# EAGLE board christmas_card (EAGLE 9.6.2)
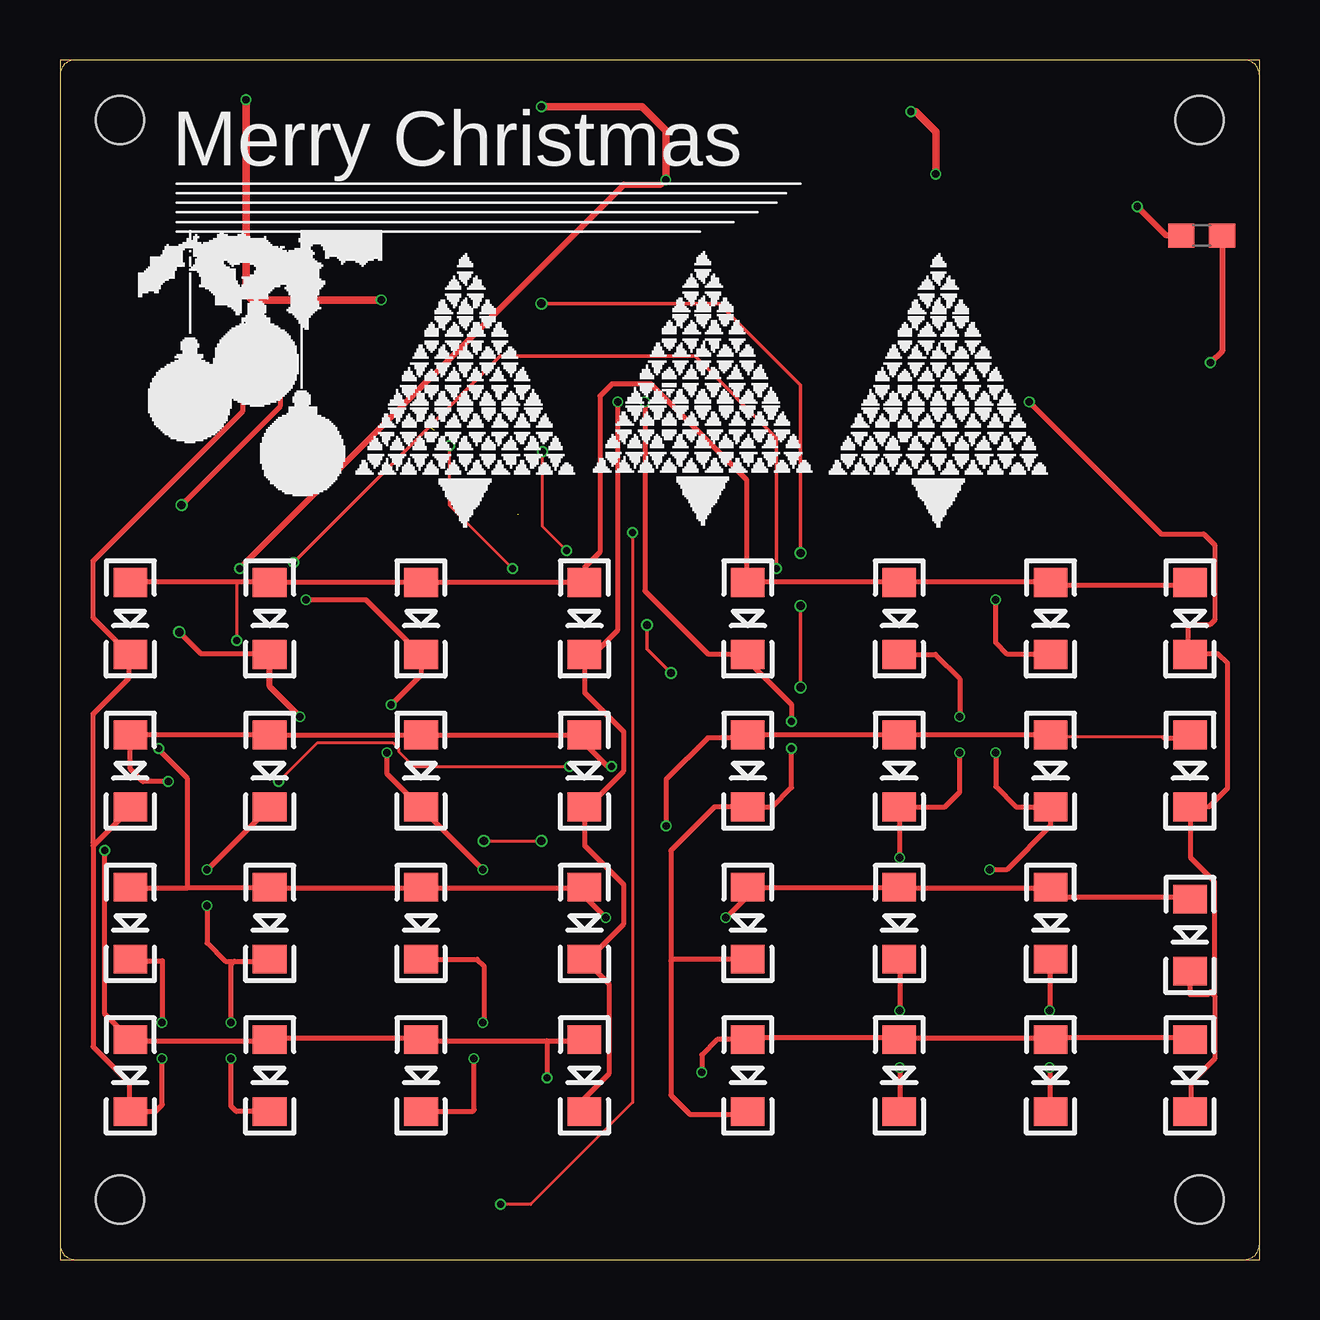
[diagram p0: board, top side]
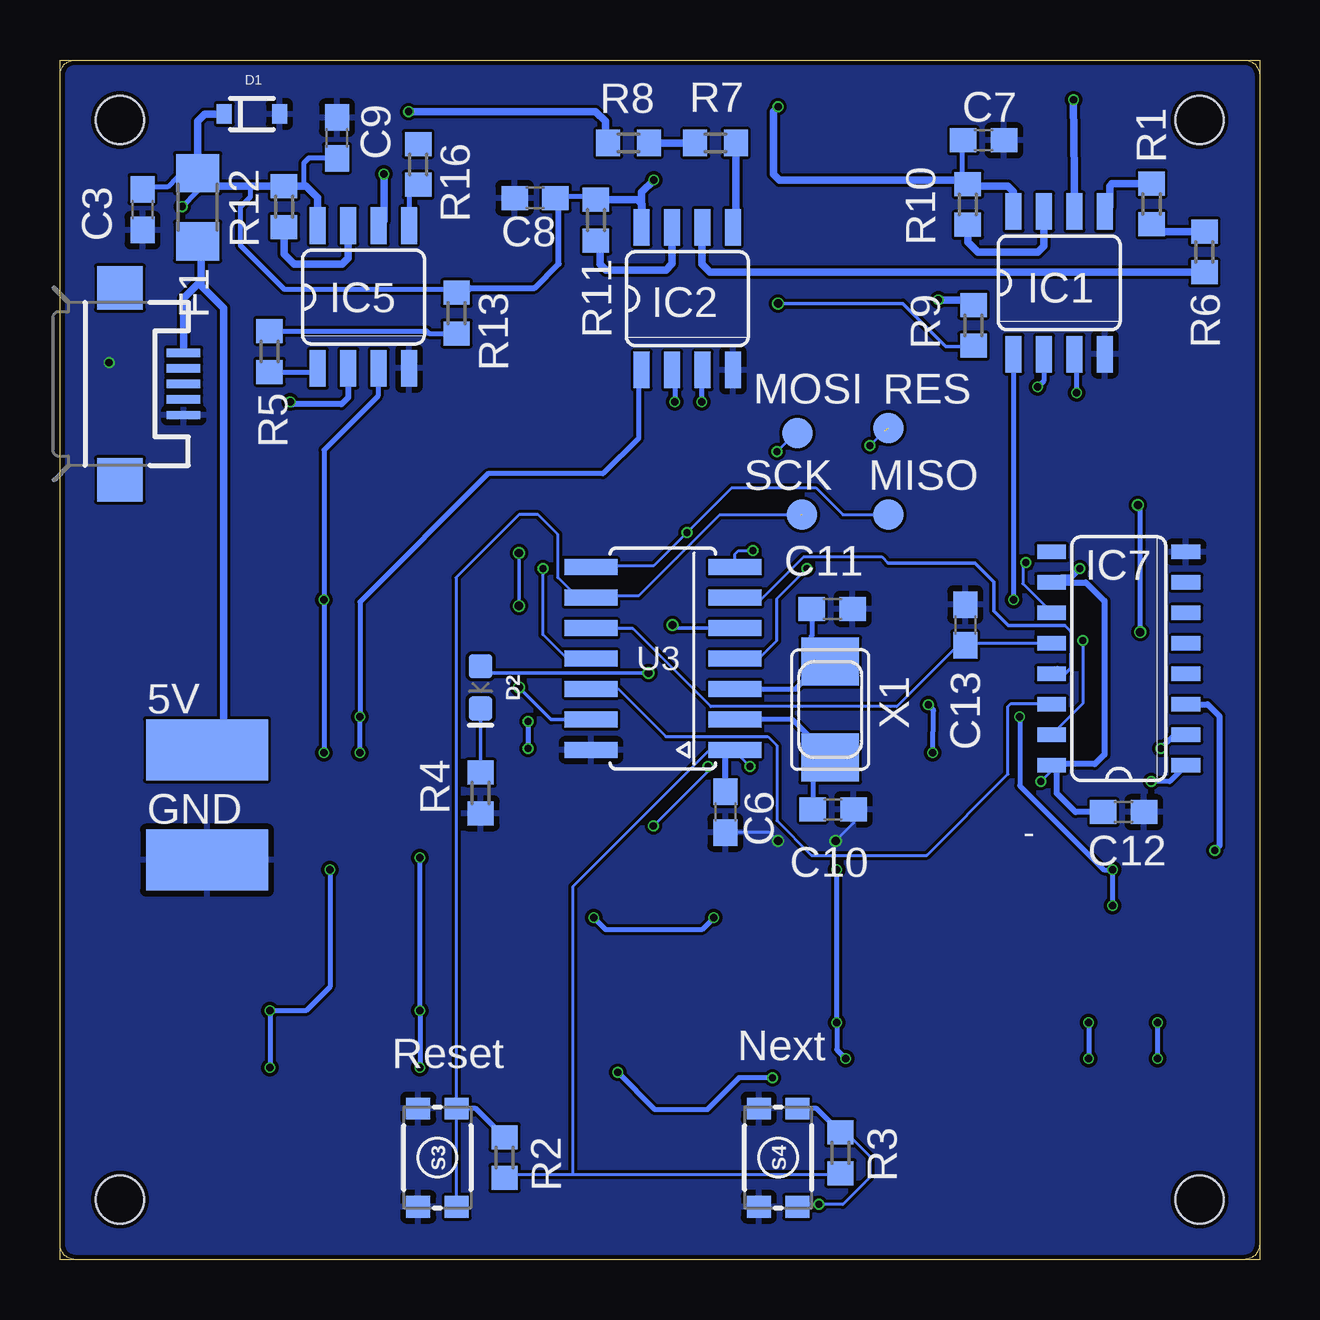
[diagram p1: board, bottom side, seen from below]

Size 50 x 50 mm. Coordinates in mm from the lower left corner, seen from the top.
Outline: 50,0.63 50,49.36 arc90 49.36,50 0.63,50 arc90 0,49.36 0,0.63 arc90 0.63,0 49.36,0 arc90 50,0.63
Outline: 0,0 50,0 50,50 0,50 0,0
Copper layers (1*16): Top 0.035mm / dielectric 1.6mm / Bottom 0.035mm
Design rules "jlcpcb-2layers *": minimum track width 5mil, minimum drill 0.3mm, track to track 5mil, track to pad 5mil, pad to pad 5mil, via to via 5mil, smd to smd 5mil, copper to edge 0.2mm, drill to drill 6mil, minimum pad ring 10mil, minimum via ring 3mil, stop-mask expansion 4mil, vias tented up to drill 14mil, thermal gap 10mil
Holes 2 mm at 2.5,2.5 47.5,2.5 47.5,47.5 2.5,47.5

## Footprints (pad centres in the part's own frame; a part is rotated, then mirrored left to right if it is on the bottom)
SMD2,54-5,08 = smd 2.54 x 5.08: 1 0,0
C0603 = smd 1.1 x 1: 1 -0.85,0; 2 0.85,0
SOD-323 = smd 0.63 x 0.83: 1 -1.15,0; 2 1.15,0
LED-0603 = smd 1 x 1: A -0.877,0; C 0.877,0
R1206 = smd 1.6 x 1.803: 1 -1.422,0; 2 1.422,0
SO08-SKINNYPADS = smd 0.66 x 1.524: 1 -1.905,-2.973; 2 -0.635,-2.973; 3 0.635,-2.973; 4 1.905,-2.973; 5 1.905,2.973; 6 0.635,2.973; 7 -0.635,2.973; 8 -1.905,2.973
SO16 = smd 0.6 x 1.2: 1 -4.445,-2.8; 2 -3.175,-2.8; 3 -1.905,-2.8; 4 -0.635,-2.8; 5 0.635,-2.8; 6 1.905,-2.8; 7 3.175,-2.8; 8 4.445,-2.8; 9 4.445,2.8; 10 3.175,2.8; 11 1.905,2.8; 12 0.635,2.8; 13 -0.635,2.8; 14 -1.905,2.8; 15 -3.175,2.8; 16 -4.445,2.8
LED-1206 = smd 1.2 x 1.4: A -1.5,0; C 1.5,0
B1,27 = smd 1.27 x 1.27: TP 0,0
R0603 = smd 1 x 1.1: 1 -0.85,0; 2 0.85,0
TACTILE_SWITCH_SMD_4.6X2.8MM = smd 0.9 x 1: 1 -2.05,-0.8; 2 2.05,-0.8; 3 2.05,0.8; 4 -2.05,0.8
SOIC14N = smd 0.66 x 2.2: 1 -3.81,-3; 2 -2.54,-3; 3 -1.27,-3; 4 0,-3; 5 1.27,-3; 6 2.54,-3; 7 3.81,-3; 8 3.81,3; 9 2.54,3; 10 1.27,3; 11 0,3; 12 -1.27,3; 13 -2.54,3; 14 -3.81,3
NX5032 = smd 2 x 2.4: P$1 2,0; P$2 -2,0
USB-MICROB = smd 0.35 x 1.4: D+ 0,2.65; D- -0.65,2.65; GND 1.3,2.65; ID 0.65,2.65; VBUS -1.3,2.65 | smd 1.8 x 1.9: MT1 -4,0; MT2 4,0

## Placement (x,y rotation side)
5V  WIREPADSMD2,54-5,08  [SMD2,54-5,08]  43.87,21.25 270 bottom
C1  100nF  [C0603]  47.59,42.68 0 top
C3  10nF  [C0603]  46.56,43.76 270 bottom
C6  100nF  [C0603]  22.27,18.65 270 bottom
C7  100nF  [C0603]  11.5,46.65 0 bottom
C8  100nF  [C0603]  30.2,44.25 180 bottom
C9  100nF  [C0603]  38.45,46.75 90 bottom
C10  12pF  [C0603]  17.77,18.77 180 bottom
C11  12pF  [C0603]  17.81,27.12 180 bottom
C12  100nF  [C0603]  5.67,18.65 0 bottom
C13  10nF  [C0603]  12.27,26.45 270 bottom
D1  DIODE-ZENER-BZT52  [SOD-323]  42,47.75 0 bottom
D2  [LED-0603]  32.47,23.85 270 bottom
F1  [R1206]  44.26,43.86 270 bottom
GND  WIREPADSMD2,54-5,08  [SMD2,54-5,08]  43.87,16.65 270 bottom
IC1  WS2811-SOP8  [SO08-SKINNYPADS]  8.35,40.71 0 bottom
IC2  WS2811-SOP8  [SO08-SKINNYPADS]  23.85,40.05 0 bottom
IC5  WS2811-SOP8  [SO08-SKINNYPADS]  37.35,40.12 0 bottom
IC7  74LS595D  [SO16]  5.87,25.05 90 bottom
LED1  [LED-1206]  47.1,20.37 270 top
LED2  [LED-1206]  47.1,26.72 270 top
LED4  [LED-1206]  41.29,7.67 270 top
LED5  [LED-1206]  41.29,14.02 270 top
LED6  [LED-1206]  41.29,20.37 270 top
LED7  [LED-1206]  41.29,26.72 270 top
LED8  [LED-1206]  47.1,13.52 270 top
LED9  [LED-1206]  47.1,7.67 270 top
LED13  [LED-1206]  2.93,7.67 270 top
LED14  [LED-1206]  8.74,7.67 270 top
LED15  [LED-1206]  15.05,7.67 270 top
LED16  [LED-1206]  21.86,7.67 270 top
LED17  [LED-1206]  28.67,7.67 270 top
LED18  [LED-1206]  34.98,7.67 270 top
LED19  [LED-1206]  2.93,14.02 270 top
LED20  [LED-1206]  8.74,14.02 270 top
LED21  [LED-1206]  15.05,14.02 270 top
LED22  [LED-1206]  21.86,14.02 270 top
LED23  [LED-1206]  28.67,14.02 270 top
LED24  [LED-1206]  34.98,14.02 270 top
LED25  [LED-1206]  2.93,20.37 270 top
LED26  [LED-1206]  8.74,20.37 270 top
LED27  [LED-1206]  15.05,20.37 270 top
LED28  [LED-1206]  21.86,20.37 270 top
LED29  [LED-1206]  28.67,20.37 270 top
LED30  [LED-1206]  34.98,20.37 270 top
LED31  [LED-1206]  2.93,26.72 270 top
LED32  [LED-1206]  8.74,26.72 270 top
LED33  [LED-1206]  15.05,26.72 270 top
LED34  [LED-1206]  21.86,26.72 270 top
LED35  [LED-1206]  28.67,26.72 270 top
LED36  [LED-1206]  34.98,26.72 270 top
MISO  TPB1,27  [B1,27]  15.47,31.05 0 bottom
MOSI  TPB1,27  [B1,27]  19.27,34.45 0 bottom
R1  33  [R0603]  4.5,44 90 bottom
R2  [R0603]  31.47,4.25 270 bottom
R3  [R0603]  17.47,4.45 270 bottom
R4  480  [R0603]  32.47,19.45 90 bottom
R5  33  [R0603]  41.27,37.85 270 bottom
R6  33  [R0603]  2.3,42 270 bottom
R7  33  [R0603]  22.68,46.54 0 bottom
R8  33  [R0603]  26.3,46.54 180 bottom
R9  33  [R0603]  11.92,38.94 90 bottom
R10  0  [R0603]  12.16,43.98 270 bottom
R11  0  [R0603]  27.66,43.32 270 bottom
R12  0  [R0603]  40.66,43.89 270 bottom
R13  33  [R0603]  33.47,39.45 270 bottom
R16  33  [R0603]  35.07,45.65 270 bottom
RES  TPB1,27  [B1,27]  15.47,34.65 0 bottom
S3  MOMENTARY-SWITCH-SPST-SMD-4.6X2.8MM  [TACTILE_SWITCH_SMD_4.6X2.8MM]  34.27,4.25 270 bottom
S4  MOMENTARY-SWITCH-SPST-SMD-4.6X2.8MM  [TACTILE_SWITCH_SMD_4.6X2.8MM]  20.07,4.25 270 bottom
SCK  TPB1,27  [B1,27]  19.07,31.05 0 bottom
U3  ATTINY24/44/84-SSU  [SOIC14N]  24.87,25.05 90 bottom
X1  [NX5032]  17.89,22.93 90 bottom
X2  USB-MICROB  [USB-MICROB]  47.5,36.5 270 bottom

## Library data of the parts
5V GND = wirepad
C1 C3 C6-C13 F1 IC1 IC2 IC5 R1-R13 R16 X1 = adafruit
D1 LED1 LED2 LED4-LED9 LED13-LED36 X2 = SparkFun
D2 = SparkFun-LED
IC7 = SparkFun; SPICEPREFIX: X
MISO MOSI RES SCK = testpad
S3 S4 = SparkFun-Switches; PROD_ID: SWCH-15606
U3 = bt_avr

## Nets
5V: C1.1 C3.1 C6.1 C7.1 C8.1 C9.1 C12.1 D1.1 F1.1 IC1.8 IC2.8 IC5.8 IC7.10 IC7.16 R2.2 R3.2 R10.1 R11.1 R12.1 R13.1 U3.1
BT0: R2.1 S3.3 S3.4 SCK.TP U3.9
BT1: MISO.TP R3.1 S4.3 S4.4 U3.8
COL0: IC1.3 LED13.C LED19.C LED25.C LED31.C
COL1: IC1.2 LED14.C LED20.C LED26.C LED32.C
COL2: IC1.1 LED15.C LED21.C LED27.C LED33.C
COL3: IC2.3 LED16.C LED22.C LED28.C LED34.C
COL4: IC2.2 LED17.C LED23.C LED29.C LED35.C
COL5: IC2.1 LED18.C LED24.C LED30.C LED36.C
COL6: IC5.3 LED4.C LED5.C LED6.C LED7.C
COL7: IC5.2 LED1.C LED2.C LED8.C LED9.C
DEBUGLED0: D2.A U3.5
GND: C1.2 C3.2 C6.2 C7.2 C8.2 C9.2 C10.1 C11.1 C12.2 C13.1 D1.2 GND.1 IC1.4 IC2.4 IC5.4 IC7.8 R4.1 S3.1 S3.2 S4.1 S4.2 U3.14 X2.GND
LATCH: C13.2 IC7.12 U3.10
LEDDATA: R9.1 U3.13
LEDROW0: IC7.15 LED2.A LED7.A LED31.A LED32.A LED33.A LED34.A LED35.A LED36.A
LEDROW1: IC7.1 LED1.A LED6.A LED25.A LED26.A LED27.A LED28.A LED29.A LED30.A
LEDROW2: IC7.2 LED5.A LED8.A LED19.A LED20.A LED21.A LED22.A LED23.A LED24.A
LEDROW3: IC7.3 LED4.A LED9.A LED13.A LED14.A LED15.A LED16.A LED17.A LED18.A
MOSI: MOSI.TP U3.7
N$1: R1.1 R6.1
N$2: IC1.5 R1.2
N$3: IC2.6 R6.2
N$4: IC2.5 R7.2
N$5: R7.1 R8.1
N$6: IC5.6 R8.2
N$7: IC1.6 R9.2
N$8: IC5.7 R12.2
N$9: D2.C R4.2
N$10: C10.2 U3.2 X1.P$2
N$11: IC5.5 R16.2
N$12: R5.1 R13.2
N$14: C11.2 U3.3 X1.P$1
N$35: IC2.7 R11.2
N$36: IC1.7 R10.2
N$40: IC7.9
N$62: IC5.1 R5.2
PWM: IC7.13 U3.6
RCLK: IC7.11 U3.11
RES: RES.TP U3.4
SER: IC7.14 U3.12
VCC: 5V.1 F1.2 X2.VBUS

## Tracks (layer width: path | path; a pad name or v marks a point on that pad's centre or on a via)
5V  (via drill 0.3)
  Top 0.127: v21.24,20.55 14.74,20.55 14.12,21.17 14.12,21.3 13.87,21.55 10.74,21.55 v9.12,19.92
  Top 0.254: v7.49,28.8 23.5,44.81 25.06,44.81 v25.25,45 25.25,45.03 25.27,45.05 | v44.91,43.89 46.12,42.68 C1.1
  Top 0.305: v20.07,48.05 24.27,48.05 25.27,47.05 25.27,45.05
  Bottom 0.127: 28.62,3.55 31.24,3.55 31.37,3.42 R2.2 | 28.62,3.55 17.49,3.55 R3.2 | 21.87,21.17 22.27,21.17 22.99,21.17 28.62,15.55 28.62,3.55 | 8.49,20.55 8.62,20.67 IC7.16 | 8.49,20.55 8.37,20.42 8.45,20.47 IC7.16 | R10.1 12.24,44.92 12.33,45 | C8.1 29.31,44.3 29.06,44.3 | R11.1 27.74,44.3 27.84,44.3 | v21.24,20.55 21.87,21.17 | 8.49,20.55 v9.12,19.92 | 21.87,21.17 U3.1 | 8.49,20.55 IC7.16
  Bottom 0.203: 44.3,45.11 45.11,45.11 45.52,44.7 46.53,44.7 C3.1 | v44.91,43.89 44.3,44.5 44.3,45.11 | 44.3,45.11 F1.1 | C7.1 12.39,46.53 12.39,45.11 R10.1 | 39.75,44.75 39.83,44.7 39.83,45.71 39.62,45.92 38.87,45.92 C9.1 | 27.84,44.3 29.06,44.3 | 42,44.75 42.06,44.7 42.06,44.3 42.47,43.89 42.47,42.27 40.64,40.44 33.47,40.44 R13.1 | C8.1 29.47,44.37
  Bottom 0.254: C8.1 29.21,44.11 29.21,41.51 30.22,40.49 32.91,40.49 33.1,40.3 R13.1 | C6.1 22.27,21.17 | IC7.10 8.47,28.22 8.25,28.44 7.85,28.44 | 8.62,20.67 8.59,20.65 6.87,20.65 6.47,21.05 6.47,27.45 7.24,28.22 8.07,28.22 7.85,28.44 | C12.1 7.67,18.65 8.45,19.43 8.45,20.47 | v7.49,28.8 7.85,28.44
  Bottom 0.305: IC1.8 10.25,44.5 10.5,44.75 12.08,44.75 R10.1 | R11.1 25.92,44.17 25.75,44 IC2.8 25.75,44.49 v25.25,45 | 12.33,45 20.02,45 20.27,45.25 20.27,47.85 v20.07,48.05 | IC5.8 39.25,44.25 39.75,44.75 40.65,44.75 R12.1 40.67,44.75 42,44.75 43.73,44.75 F1.1 44.27,47.45 43.97,47.75 D1.1
BT0  (1 unrouted)
  Bottom 0.127: 33.49,6.3 33.49,6.25 | 33.49,6.05 33.49,2.3 S3.3 | 33.49,6.3 S3.4 | 19.12,31.05 22.49,31.05 25.87,27.67 27.87,27.67 | 27.87,27.67 28.49,27.67 29.24,28.42 29.24,30.22 30.07,31.05 30.87,31.05 33.49,28.42 33.49,6.3 | 27.87,27.67 U3.9
  Bottom 0.152: 33.49,6.05 33.49,6.25
  Bottom 0.203: R2.1 32.67,6.3 S3.4
BT1  (via drill 0.3)
  Top 0.127: v18.37,2.3 19.62,2.3 23.87,6.55 23.87,21.05 v23.87,30.3
  Bottom 0.127: R3.1 17.24,5.3 16.24,4.3 16.24,3.42 17.37,2.3 v18.37,2.3 19.24,2.3 S4.3 | MISO.TP 17.37,31.05 18.49,32.17 21.99,32.17 v23.87,30.3 25.24,28.92 27.87,28.92 U3.8
  Bottom 0.203: R3.1 18.47,6.3 S4.4
COL0  (via drill 0.3)
  Top 0.203: 1.44,17.31 2.87,18.75 LED25.C | 1.44,17.31 1.37,17.25 1.37,8.87 2.87,7.37 2.87,6.25 LED13.C 3.99,6.17 4.27,6.45 4.27,8.25 4.19,8.32 v4.25,8.37 | 1.44,17.31 1.37,17.37 1.37,22.75 2.87,24.25 2.87,25.12 LED31.C 2.87,25.25 1.37,26.75 1.37,29.12 7.62,35.37 v7.62,36.12 | LED19.C 3,12.45 4.27,12.45 4.27,9.89 v4.25,9.87
  Bottom 0.203: v4.25,8.37 v4.25,9.87 | v7.62,36.12 7.62,37.62 IC1.3
COL1  (via drill 0.3, 0.35)
  Top 0.203: 8.5,12.37 8.62,12.5 LED20.C 8.5,12.37 | v6.12,16.25 8.62,18.75 LED26.C | 8.5,12.37 8.45,12.43 7.27,12.43 | v9.25,36.37 9.19,36.32 9.19,35.58 v5.07,31.45 | LED32.C 8.62,25.25 5.87,25.25 v4.97,26.15 | LED14.C 7.35,6.17 7.12,6.39 v7.12,8.37 | v6.12,14.75 6.12,13.19 6.89,12.43 7.27,12.43 | v7.12,9.87 7.12,12.29 7.27,12.43
  Top 0.254: v10,22.62 8.74,23.88 LED32.C
  Bottom 0.203: v7.12,9.87 v7.12,8.37 | v6.12,14.75 v6.12,16.25 6.5,16.25 10,19.75 v10,22.62 | v9.25,36.37 9,36.62 9,37.62 IC1.2 | v4.97,26.15 4.97,31.35 v5.07,31.45
COL2  (via drill 0.3)
  Top 0.2: v13.8,23.12 15.05,24.37 LED33.C
  Top 0.203: v17.62,16.25 15.12,18.75 LED27.C 15,18.87 13.62,20.25 v13.62,21.12 | 15,25.12 LED33.C 15,25.25 12.75,27.5 v10.25,27.5 | LED21.C 17.4,12.52 17.67,12.25 17.67,9.92 v17.62,9.87 | LED15.C 17.19,6.17 17.27,6.25 17.27,8.36 v17.25,8.37
  Bottom 0.203: v17.25,8.37 17.62,8.75 v17.62,9.87 v17.62,16.25 | v13.8,23.12 13.61,22.94 13.59,22.88 v13.62,21.12 | v10.25,27.5 10.25,37.62 IC1.1
COL3  (via drill 0.3)
  Top 0.203: LED16.C 21.87,6.25 21.87,6.75 22.87,7.75 22.87,11.5 21.87,12.5 LED22.C 22,12.5 23.5,14 23.5,15.62 21.87,17.25 21.87,18.75 | 21.87,24.87 21.87,23.62 23.5,22 23.5,20.37 21.87,18.75 | 21.87,24.87 21.87,25.12 LED34.C 21.87,24.87 | 21.87,18.75 LED28.C | v23.25,35.75 23.25,26.25 21.87,24.87
  Bottom 0.203: 23.16,36.98 IC2.3 23.25,37 v23.25,35.75
COL4  (via drill 0.3)
  Top 0.127: 30.49,21.25 v30.49,21.3
  Top 0.203: 28.62,6.25 LED17.C 28.55,6.05 26.27,6.05 25.47,6.85 25.47,12.45 | 28.62,18.75 LED29.C | 28.37,25.25 27,25.25 24.37,27.87 v24.37,35.75 | 28.37,25.25 28.62,25.25 LED35.C 28.37,25.25 | LED29.C 27.29,18.87 25.47,17.05 25.47,12.45 | LED23.C 25.54,12.52 25.47,12.45 | v30.49,22.42 30.49,23.13 28.37,25.25 | LED29.C 29.69,18.87 30.49,19.67 30.49,21.25
  Bottom 0.203: 24.59,36.98 IC2.2 | 24.62,37 IC2.2 | v24.37,35.75 24.37,37 IC2.2 | v30.49,22.42 v30.49,21.3
COL5  (via drill 0.3)
  Top 0.203: v35,8 35,6.25 LED18.C | v35,10.37 35,12.5 LED24.C | v35,16.75 35,18.62 | 35,18.62 35,18.75 LED30.C | 35,18.62 LED30.C | LED36.C 36.5,25.22 37.5,24.22 v37.5,22.62 | LED30.C 36.89,18.87 37.5,19.48 v37.5,21.12
  Bottom 0.203: 25.81,36.98 IC2.1 25.87,37 25.87,34.25 27.37,32.75 32.16,32.75 37.5,27.42 v37.5,22.62 v37.5,21.12 | v35,8 v35,10.37 v35,16.75
COL6  (via drill 0.3)
  Top 0.203: v41.25,8 41.25,6.25 LED4.C | v41.25,10.37 41.25,12.5 LED5.C | LED7.C 39.5,25.22 39,25.72 v39,27.5 | v39,21.12 39,19.72 39.85,18.87 LED6.C 41.29,18.07 39.47,16.25 v38.75,16.25
  Bottom 0.203: 36.78,36.98 IC5.3 | 36.87,37 IC5.3 | v41.25,8 v41.25,10.37 39.74,10.37 38.75,11.37 v38.75,16.25 | IC5.3 36.75,37 36.75,36 39,33.75 v39,27.5 v39,21.12
COL7  (via drill 0.3)
  Top 0.203: LED8.C 47.1,11.05 47.85,11.05 47.96,11.16 48.06,11.06 | 48.06,11.06 48.12,11 48.12,8.37 47.12,7.37 47.12,6.25 LED9.C | 48.06,11.06 48.12,11.12 48.12,15.75 47.12,16.75 47.12,18.75 LED1.C 47.12,18.87 47.89,18.87 48.67,19.65 48.67,24.85 48.27,25.25 47.27,25.25 47.17,25.15 LED2.C 47,25.12 47,26.38 47.07,26.45 47.92,26.45 48.12,26.65 48.12,29.79 47.67,30.25 45.9,30.25 v40.4,35.75
  Bottom 0.203: 38,37.12 IC5.2
  Bottom 0.254: IC5.2 37.98,35.93 38.27,35.65 40.3,35.65 v40.4,35.75
DEBUGLED0  (via drill 0.35)
  Top 0.152: v25.47,24.45 24.47,25.45 v24.47,26.45
  Bottom 0.152: D2.A 32.19,24.45 v25.47,24.45 | v24.47,26.45 24.34,26.32 U3.5
GND  (via drill 0.3, 0.35)
  Top 0.127: v17.67,17.45 v20.07,17.45
  Top 0.203: 48.55,42.81 C1.2
  Top 0.254: C1.2 48.44,37.87 v47.95,37.39
  Bottom 0.127: C10.1 16.92,18.19 v17.67,17.45 | v20.07,17.45 20.42,17.8 C6.2
  pour Bottom: -1.27,50.8 51.02,50.62 51.02,-1.45 -1.27,-1.27
LATCH
  Bottom 0.127: IC7.12 8.74,25.67 12.24,25.67 C13.2 12.37,25.55 12.62,25.55 15.12,23.05 22.87,23.05 26.12,26.3 27.87,26.3 U3.10
LEDDATA  (via drill 0.35)
  Top 0.152: v30.87,23.85 v30.87,27.25 | v30.87,29.45 30.87,36.45 27.47,39.85 v20.07,39.85
  Bottom 0.152: U3.13 29.53,22.51 v30.87,23.85 | v30.87,27.25 v30.87,29.45 | v20.07,39.85 14.87,39.85 13.07,38.05 11.96,38.05 R9.1
LEDROW0  (via drill 0.3)
  Top 0.127: 7.37,28.25 v7.37,25.8
  Top 0.203: LED31.A 3,28.25 7.37,28.25 8.62,28.25 LED32.A 8.75,28.25 15,28.25 LED33.A 15.12,28.25 21.75,28.25 LED34.A 21.87,28.25 21.87,28.87 22.5,29.5 22.5,36 23,36.5 24.62,36.5 28.62,32.5 28.62,28.25 LED35.A 28.75,28.25 34.87,28.25 LED36.A 35,28.25 41.25,28.25 LED7.A 41.5,28.12 47,28.12 LED2.A
  Bottom 0.127: IC7.15 7.37,23.17 v7.37,25.8
LEDROW1  (via drill 0.3)
  Top 0.127: 2.93,21.65 LED25.A | v22.99,20.55 22.74,20.55 22.75,20.62 | 46,21.75 45.99,21.8 41.37,21.8 LED6.A
  Top 0.203: LED25.A 3,21.87 8.62,21.87 LED26.A 8.75,21.87 15,21.87 LED27.A 15.12,21.87 21.75,21.87 LED28.A 21.87,21.75 21.87,21.5 22.75,20.62 | 46,21.75 47,21.75 LED1.A | LED6.A 41.25,21.87 35,21.87 LED30.A 34.87,21.87 28.75,21.87 LED29.A 28.62,21.75 27,21.75 25.27,20.02 v25.27,18.07 | v4.52,19.92 3.45,19.92 2.93,20.45 2.93,21.65
  Bottom 0.127: v25.27,18.07 22.99,20.35 v22.99,20.55
  Bottom 0.203: IC7.1 3.75,19.92 v4.52,19.92
LEDROW2  (via drill 0.3)
  Top 0.127: 4.22,21.2 v4.12,21.3
  Top 0.203: LED8.A 47,15.12 41.75,15.12 41.37,15.5 LED5.A 41.25,15.5 35,15.5 LED24.A 34.87,15.5 28.75,15.5 LED23.A 28.62,15.5 28.62,15.12 v27.75,14.25 | 3,15.5 LED19.A 3.12,15.5 5.32,15.5 | 5.32,15.5 8.62,15.5 LED20.A 8.75,15.5 15,15.5 LED21.A 15.12,15.5 21.5,15.5 | 21.5,15.5 21.75,15.5 LED22.A 21.5,15.5 | 21.5,15.5 v22.75,14.25 | 5.32,15.5 5.32,20.05 4.22,21.15 4.22,21.2
  Bottom 0.127: 3.27,21.8 3.12,21.8 IC7.2
  Bottom 0.203: v27.75,14.25 27.25,13.75 23.25,13.75 v22.75,14.25 | v4.12,21.3 3.62,21.8 3.27,21.8
LEDROW3  (via drill 0.3)
  Top 0.203: LED9.A 47,9.25 41.37,9.25 LED4.A 41.25,9.25 35,9.25 LED18.A 34.87,9.25 28.75,9.25 LED17.A 27.39,9.17 26.75,8.53 v26.75,7.8 | 20.3,9.12 15.12,9.12 LED15.A 15,9.25 8.75,9.25 LED14.A 8.62,9.12 3,9.12 LED13.A 1.87,10.23 v1.87,17.05 | 20.3,9.12 21.5,9.12 | 21.5,9.12 21.75,9.12 LED16.A 21.5,9.12 | 20.3,9.12 v20.3,7.57
  Bottom 0.203: v26.75,7.8 25.2,6.25 23.02,6.25 21.7,7.57 v20.3,7.57
  Bottom 0.254: IC7.3 2.16,23.14 1.67,22.65 1.67,17.25 v1.87,17.05
MOSI  (via drill 0.3)
  Top 0.127: v20.12,33.67 20.12,30.55 v21.12,29.55
  Bottom 0.127: v20.12,33.67 19.37,34.42 MOSI.TP | U3.7 21.87,29.4 21.72,29.55 v21.12,29.55
N$1
  Bottom 0.305: R6.1 4.2,42.85 R1.1
N$2
  Bottom 0.305: R1.2 6.15,44.85 6.25,44.75 6.25,43.88 IC1.5
N$3
  Bottom 0.305: R6.2 22.9,41.15 23.25,41.5 23.25,42.99 IC2.6
N$4
  Bottom 0.305: R7.2 21.83,43.14 IC2.5
N$5
  Bottom 0.305: R7.1 R8.1
N$6  (via drill 0.3)
  Top 0.305: v36.5,45.25 36.5,47.02 35.67,47.85 v35.47,47.85
  Bottom 0.2: v36.5,45.25
  Bottom 0.305: v36.5,45.25 36.5,43.31 IC5.6 | v35.47,47.85 27.67,47.85 27.27,47.45 27.27,46.66 R8.2
N$7  (via drill 0.3)
  Top 0.305: v7.75,48.35 7.75,40.25 8,40 v13.39,40
  Bottom 0.305: IC1.6 7.71,45.16 v7.75,48.35 | v13.39,40 11.71,40 R9.2
N$8
  Bottom 0.305: R12.2 40.66,41.91 40.25,41.5 38.25,41.5 38,41.75 38,43.08 IC5.7
N$9
  Bottom 0.152: D2.C R4.2
N$10
  Bottom 0.203: U3.2 19.48,22.51 X1.P$2 18.62,20.2 C10.2
N$11
  Bottom 0.203: R16.2 35.44,44.42 IC5.5
N$12
  Bottom 0.203: R5.1 34.72,38.7 34.62,38.6 R13.2
N$14
  Bottom 0.203: U3.3 19.34,23.78 18.19,24.93 X1.P$1 18.69,25.73 18.69,25.96 18.66,25.99 C11.2
N$35
  Bottom 0.305: IC2.7 24.48,41.51 24.75,41.25 27.25,41.25 27.5,41.5 27.5,42.31 R11.2
N$36
  Bottom 0.305: R10.2 12.16,42.41 11.75,42 9.25,42 9,42.25 9,43.67 IC1.7
N$62
  Bottom 0.203: R5.2 39.4,37 IC5.1
PWM
  Bottom 0.127: 8.43,24.61 8.62,24.42 IC7.13 | 7.87,25.25 7.87,26.17 8.12,26.42 | 15.48,29.04 15.74,29.3 18.99,29.3 20.74,27.55 21.87,27.55 U3.6
  Bottom 0.15: 15.48,29.04 11.85,29.04 11.07,28.25 11.07,27.02 10.47,26.42 8.12,26.42 | 8.43,24.69 8.43,24.61 | 7.87,25.25 7.87,24.65 8.09,24.42 8.62,24.42
RCLK  (via drill 0.3)
  Top 0.152: v9.74,29.05 18.34,37.65 26.47,37.65 29.87,34.25 v29.87,28.8
  Bottom 0.127: v9.74,29.05 9.87,28.92 9.87,28.17 8.74,27.05 IC7.11 | v29.87,28.8 29.87,26.05 28.87,25.05 U3.11
RES  (via drill 0.3)  (1 unrouted)
  Top 0.127: v16.24,33.92 16.24,31.42 v18.87,28.8
  Bottom 0.127: v16.24,33.92 15.62,34.55 | v18.87,28.8 20.12,27.55 20.12,25.8 20.87,25.05 U3.4
SER
  Bottom 0.127: IC7.14 8.74,23.17 10.37,23.17 10.48,23.06 10.48,20.24 13.87,16.85 18.67,16.85 20.12,18.3 20.12,18.92 20.12,21.42 20.49,21.8 24.74,21.8 26.74,23.8 27.87,23.8 U3.12
VCC
  Bottom 0.254: 42.87,22.25 43.17,21.95 5V.1
  Bottom 0.305: X2.VBUS 44.85,40.07 44.12,40.8 | 43.17,21.95 43.17,39.65 44.12,40.6 44.12,40.8 | F1.2 44.12,42.29 44.12,40.8

## Text on the board
tPlace: Merry Christmas
bPlace: Next | Reset